# EAGLE board Main (EAGLE 9.6.2)
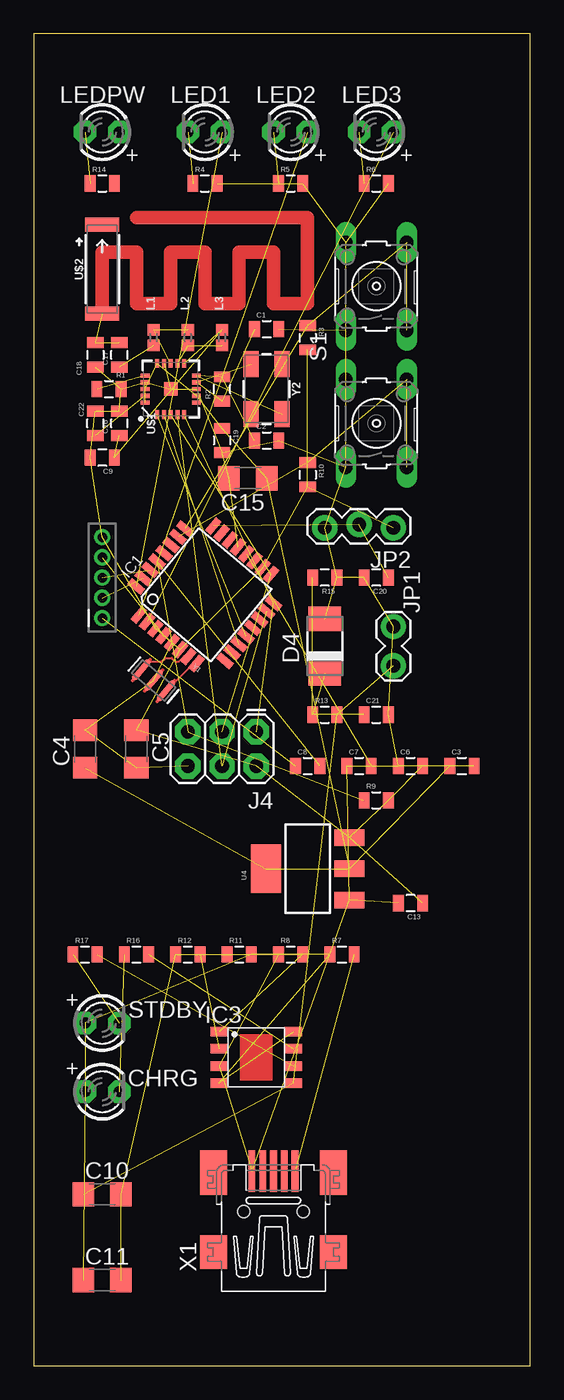
[diagram p0: board, top side]
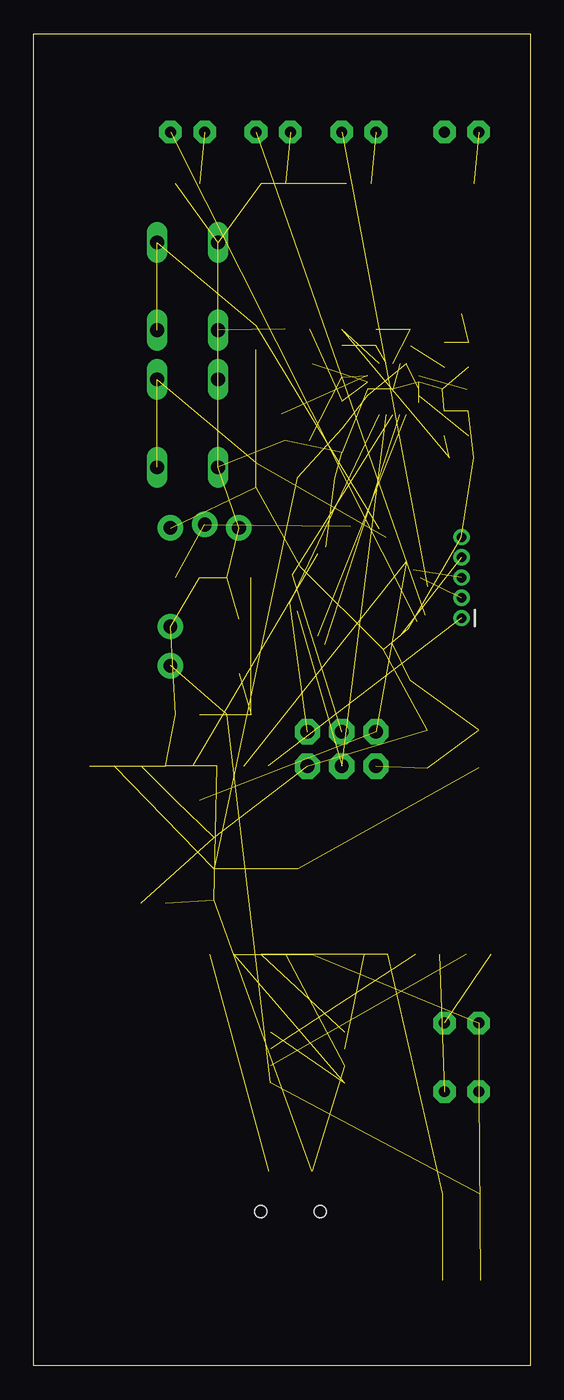
[diagram p1: board, bottom side, seen from below]

Size 36.81 x 98.73 mm. Coordinates in mm from the lower left corner, seen from the top.
Outline: 0,0 36.81,0 36.81,98.73 0,98.73 0,0
Copper layers (1*16): Top 0.035mm / dielectric 1.5mm / Bottom 0.035mm
Design rules "default": minimum track width 6mil, minimum drill 0.35mm, track to track 6mil, track to pad 6mil, pad to pad 6mil, via to via 6mil, smd to smd 6mil, copper to edge 40mil, drill to drill 6mil, minimum pad ring 10mil, minimum via ring 8mil, stop-mask expansion 4mil, vias tented up to drill 0mil, thermal gap 10mil
Net classes: 1 power: width 0.203 mm

## Footprints (pad centres in the part's own frame; a part is rotated, then mirrored left to right if it is on the bottom)
0805 = smd 0.8 x 1.2: 1 -0.9,0; 2 0.9,0
C1206 = smd 1.6 x 1.8: 1 -1.4,0; 2 1.4,0
LED3MM = drill 0.813 pad 1.676 octagon: A -1.27,0; K 1.27,0
DO-214AC = smd 1.8 x 2.4: A 2.025,0; C -2.025,0
TQFP32-08 = smd 1.27 x 0.559: 1 -4.293,2.8; 2 -4.293,2; 3 -4.293,1.2; 4 -4.293,0.4; 5 -4.293,-0.4; 6 -4.293,-1.2; 7 -4.293,-2; 8 -4.293,-2.8; 17 4.293,-2.8; 18 4.293,-2; 19 4.293,-1.2; 20 4.293,-0.4; 21 4.293,0.4; 22 4.293,1.2; 23 4.293,2; 24 4.293,2.8 | smd 0.559 x 1.27: 9 -2.8,-4.293; 10 -2,-4.293; 11 -1.2,-4.293; 12 -0.4,-4.293; 13 0.4,-4.293; 14 1.2,-4.293; 15 2,-4.293; 16 2.8,-4.293; 25 2.8,4.293; 26 2,4.293; 27 1.2,4.293; 28 0.4,4.293; 29 -0.4,4.293; 30 -1.2,4.293; 31 -2,4.293; 32 -2.8,4.293
SOP-8 = smd 1.3 x 0.7: 1 -2.75,1.905; 2 -2.75,0.635; 3 -2.75,-0.635; 4 -2.75,-1.905; 5 2.75,-1.905; 6 2.75,-0.635; 7 2.75,0.635; 8 2.75,1.905
PIC_ICSP_MINI_5_PIN = drill 0.7: 1 -3,0; 2 -1.5,0; 3 0,0; 4 1.5,0; 5 3,0
2X3 = drill 1.016 pad 1.88 octagon: 1 0,0; 2 0,2.54; 3 2.54,0; 4 2.54,2.54; 5 5.08,0; 6 5.08,2.54
1X02_LOCK = drill 1.016 pad 1.88: 1 -0.178,0; 2 2.718,0
1X03_LOCK = drill 1.016 pad 1.88: 1 0,0.127; 2 2.54,-0.127; 3 5.08,0.127
0402 = smd 0.85 x 0.9: 1 -0.58,0; 2 0.58,0
B3F-10XX = drill 1.016 long: 1 -3.251,2.261; 2 3.251,2.261; 3 -3.251,-2.261; 4 3.251,-2.261
SOT223 = smd 1.219 x 2.235: 1 -2.311,-3.099; 2 0,-3.099; 3 2.311,-3.099 | smd 3.6 x 2.2: 4 0,3.099
QFN20-4X4MM = smd 1 x 1: 0 0,0 | smd 0.65 x 0.3: 1 -1.9,1; 2 -1.9,0.5; 3 -1.9,0; 4 -1.9,-0.5; 5 -1.9,-1; 11 1.9,-1; 12 1.9,-0.5; 13 1.9,0; 14 1.9,0.5; 15 1.9,1 | smd 0.3 x 0.65: 6 -1,-1.9; 7 -0.5,-1.9; 8 0,-1.9; 9 0.5,-1.9; 10 1,-1.9; 16 1,1.9; 17 0.5,1.9; 18 0,1.9; 19 -0.5,1.9; 20 -1,1.9
ANT-2.4GHZ-6.5X2.2MM = smd 1.016 x 2.54: FEED -3.302,0; NC 3.302,0
32005-201 = smd 3.1 x 0.5: 1 3,1.6; 2 3,0.8; 3 3,0; 4 3,-0.8; 5 3,-1.6 | smd 2.5 x 2: M1 -3,-4.45; M2 -3,4.45 | smd 3.3 x 2: M3 2.9,4.45; M4 2.9,-4.45 | hole 0.9: 0,2.2; 0,-2.2
RESONATOR-SMD = smd 0.45 x 1.905: 1 -1.2,0; 2 0,0; 3 1.2,0
CRYSTAL-SMD-5X3.2-4PAD = smd 1.9 x 1.1: 1 -1.85,-1.15; 2 1.85,-1.15; 3 1.85,1.15; 4 -1.85,1.15

## Placement (x,y rotation side)
C1  22p  [0805]  17.27,76.83 0 top
C2  22p  [0805]  17.27,68.58 0 top
C3  0.1uF  [0805]  31.75,44.45 0 top
C4  22uF  [C1206]  3.81,45.72 90 top
C5  4.7uF  [C1206]  7.62,45.72 270 top
C6  0.1uF  [0805]  27.94,44.45 0 top
C7  0.1uF  [0805]  24.13,44.45 0 top
C8  0.1uF  [0805]  20.32,44.45 0 top
C9  2.2nF  [0805]  5.08,67.31 180 top
C10  10uF  [C1206]  5.08,12.7 0 top
C11  10uF  [C1206]  5.08,6.35 0 top
C13  0.1uF  [0805]  27.94,34.29 180 top
C15  10uF  [C1206]  15.88,65.79 180 top
C16  4.7p  [0805]  6.35,69.85 90 top
C17  1.5p  [0805]  6.35,74.93 90 top
C18  10p  [0805]  4.57,74.93 270 top
C19  1nF  [0805]  13.97,68.58 270 top
C20  22p  [0805]  25.4,58.42 180 top
C21  0.1  [0805]  25.4,48.26 0 top
C22  1uF  [0805]  4.57,69.85 90 top
CHRG  PW  [LED3MM]  5.08,20.32 0 top
D4  SZ105B  [DO-214AC]  21.59,53.34 90 top
IC1  MEGA8-AI  [TQFP32-08]  12.7,57.15 50 top
IC3  TP4056  [SOP-8]  16.51,22.86 0 top
J1  PIC_ICSP_MINI_5_PIN  [PIC_ICSP_MINI_5_PIN]  5.08,58.42 90 top
J4  SPI  [2X3]  16.51,46.99 180 top
JP1  [1X02_LOCK]  26.67,52.07 90 top
JP2  [1X03_LOCK]  26.67,62.23 180 top
L1  3.9NH  [0402]  8.89,76.2 270 top
L2  8.2NH  [0402]  11.43,76.2 270 top
L3  2.7NH  [0402]  13.97,76.2 270 top
LED1  PW  [LED3MM]  12.7,91.44 180 top
LED2  PW  [LED3MM]  19.05,91.44 180 top
LED3  PW  [LED3MM]  25.4,91.44 180 top
LEDPW  PW  [LED3MM]  5.08,91.44 180 top
R1  1k  [0805]  5.59,72.39 0 top
R2  2k  [0805]  13.97,72.39 90 top
R3  10k  [0805]  20.32,76.2 270 top
R4  330  [0805]  12.7,87.63 0 top
R5  330  [0805]  19.05,87.63 0 top
R6  330  [0805]  25.4,87.63 0 top
R7  2.2k  [0805]  22.86,30.48 0 top
R8  2.2k  [0805]  19.05,30.48 0 top
R9  10k  [0805]  25.4,41.91 0 top
R10  10k  [0805]  20.32,66.04 270 top
R11  2.2k  [0805]  15.24,30.48 0 top
R12  2.2k  [0805]  11.43,30.48 0 top
R13  4.7k  [0805]  21.59,48.26 0 top
R14  1k  [0805]  5.08,87.63 0 top
R15  2.2k  [0805]  21.59,58.42 180 top
R16  102  [0805]  7.62,30.48 0 top
R17  102  [0805]  3.81,30.48 0 top
S1  SW1  [B3F-10XX]  25.4,80.01 90 top
S2  SW2  [B3F-10XX]  25.4,69.85 90 top
STDBY  PW  [LED3MM]  5.08,25.4 0 top
U4  LM1117 3.3  [SOT223]  20.32,36.83 90 top
U$1  NRF24L01SMD  [QFN20-4X4MM]  10.16,72.39 90 top
U$2  2.45GHz  [ANT-2.4GHZ-6.5X2.2MM]  5.08,81.28 90 top
X1  MINI-USB-32005-201  [32005-201]  17.78,11.43 90 top
Y1  16MHZ  [RESONATOR-SMD]  8.89,50.8 320 top
Y2  [CRYSTAL-SMD-5X3.2-4PAD]  17.27,72.39 270 top

## Library data of the parts
C1-C3 C6-C9 C13 C16-C22 = SparkFun-Passives
C4 C5 C10 C11 C15 CHRG LED1-LED3 LEDPW STDBY = adafruit
D4 = diode
IC1 = atmel; MPN: ATMEGA8-16AU; OC_FARNELL: 9171371; OC_NEWARK: 73M8863
IC3 = TP4056
J1 = SparkFun-Connectors; PROD_ID: CONN-08314; SF_ID: PRT-11264
J4 = SparkFun-Connectors
JP1 JP2 = SparkFun
L1-L3 = SparkFun-Coils; PROD_ID: NDUC-13457
R1-R17 = SparkFun-Resistors
S1 S2 = switch-omron; MPN: B3F-1000; OC_FARNELL: 176432; OC_NEWARK: 36M3542
U4 = SparkFun-PowerIC; PROD_ID: VREG-08170
U$1 = SparkFun-RF; PROD_ID: IC-08950; SF_ID: COM-00690
U$2 = SparkFun-RF; PROD_ID: ANT-08187; SF_ID: WRL-00144
X1 = con-cypressindustries; OC_FARNELL: unknown; OC_NEWARK: unknown
Y1 = SparkFun-FreqCtrl; PROD_ID: XTAL-08900
Y2 = SparkFun-Clocks

## Nets
3.3V: C3.1 C4.1 C15.1 C19.1 U4.2 U4.4 U$1.7 U$1.15 U$1.18
A0: C21.1 D4.C R13.1 R15.2
A1: C20.1 IC1.24 JP2.2
A2: IC1.25 R3.1 S1.3 S1.4
A3: IC1.26 R10.1 S2.3 S2.4
BATT_IN: C10.1 IC3.5 JP1.1 R13.2
CS: IC1.14
D2: IC1.32 LED1.A
D3: IC1.1 LED2.A
D4: IC1.2 LED3.A
D5: IC1.9
D6: IC1.10
D7: IC1.11 U$1.2
D8: IC1.12 U$1.1
D9: IC1.13
GND: C1.2 C2.2 C3.2 C4.2 C5.2 C6.1 C7.1 C9.2 C10.2 C11.2 C13.2 C15.2 C16.2 C18.2 C19.2 C20.2 C21.2 C22.2 D4.A IC1.3 IC1.5 IC1.21 IC3.3 J1.5 J4.6 JP1.2 JP2.3 R1.2 R4.2 R5.2 R6.2 R8.1 R12.1 R15.1 S1.1 S1.2 S2.1 S2.2 U4.1 U$1.0 U$1.8 U$1.14 U$1.17 U$1.20 X1.1 Y1.2
IRQ: U$1.6
MISO: IC1.16 J4.1 U$1.5
MOSI: IC1.15 J4.4 U$1.4
N$1: LED1.K R4.1
N$2: LED2.K R5.1
N$3: LED3.K R6.1
N$4: C17.1 L1.2
N$5: IC1.8 Y1.3
N$7: IC1.7 Y1.1
N$8: C7.2 IC1.20
N$9: C8.1 J1.1
N$11: IC1.23
N$12: LEDPW.K R14.1
N$13: IC3.7 R16.2
N$14: L1.1 L2.1 U$1.13
N$15: L2.2 L3.2 U$1.12
N$16: C9.1 C16.1 L3.1 U$1.11
N$17: C22.1 U$1.19
N$18: R1.1 U$1.16
N$19: C17.2 C18.1 U$2.FEED
N$20: C1.1 R2.1 U$1.9 Y2.1
N$21: C2.1 R2.2 U$1.10 Y2.3
N$22: IC3.6 R17.2
N$23: R17.1 STDBY.K
N$24: CHRG.K R16.1
N$25: C11.1 CHRG.A IC3.4 IC3.8 R7.1 R11.2 STDBY.A
N$27: IC3.2 R12.2
N$29: IC3.1 R8.2 R11.1
N$30: R7.2 X1.5
RST: C8.2 IC1.29 J4.5 R9.1
RXD: IC1.30 J1.3
SCK: IC1.17 J4.3 U$1.3
SCL: IC1.28
SDA: IC1.27
TXD: IC1.31 J1.2
VCC: C5.1 C6.2 C13.1 IC1.4 IC1.6 IC1.18 J1.4 J4.2 JP2.1 R3.2 R9.2 R10.2 U4.3

## Tracks (layer width: path | path; a pad name or v marks a point on that pad's centre or on a via)
3.3V  (8 unrouted)
A0  (3 unrouted)
A1  (2 unrouted)
A2  (3 unrouted)
A3  (3 unrouted)
BATT_IN  (3 unrouted)
D2  (1 unrouted)
D3  (1 unrouted)
D4  (1 unrouted)
D7  (1 unrouted)
D8  (1 unrouted)
GND  (45 unrouted)
MISO  (2 unrouted)
MOSI  (2 unrouted)
N$1  (1 unrouted)
N$2  (1 unrouted)
N$3  (1 unrouted)
N$4  (1 unrouted)
N$5
  Top 0.152: IC1.8 11.84,52.06 Y1.3
N$7
  Top 0.152: Y1.1 8.59,52.19 9.49,52.19 9.77,52.46 10.24,52.46 10.52,52.19 10.76,52.19 11.15,52.58 IC1.7
N$8  (1 unrouted)
N$9  (1 unrouted)
N$12  (1 unrouted)
N$13  (1 unrouted)
N$14  (2 unrouted)
N$15  (2 unrouted)
N$16  (3 unrouted)
N$17  (1 unrouted)
N$18  (1 unrouted)
N$19  (2 unrouted)
  Top 1.016: U$2.FEED 5.08,82.55 7.62,82.55 7.62,78.74 10.16,78.74 10.16,82.55 12.7,82.55 12.7,78.74 15.24,78.74 15.24,82.55 17.78,82.55 17.78,78.74 20.32,78.74 20.32,85.09 7.62,85.09
N$20  (3 unrouted)
N$21  (3 unrouted)
N$22  (1 unrouted)
N$23  (1 unrouted)
N$24  (1 unrouted)
N$25  (6 unrouted)
N$27  (1 unrouted)
N$29  (2 unrouted)
N$30  (1 unrouted)
RST  (3 unrouted)
RXD  (1 unrouted)
SCK  (2 unrouted)
TXD  (1 unrouted)
VCC  (12 unrouted)